# EAGLE board rgbboard (EAGLE 7.3.0)
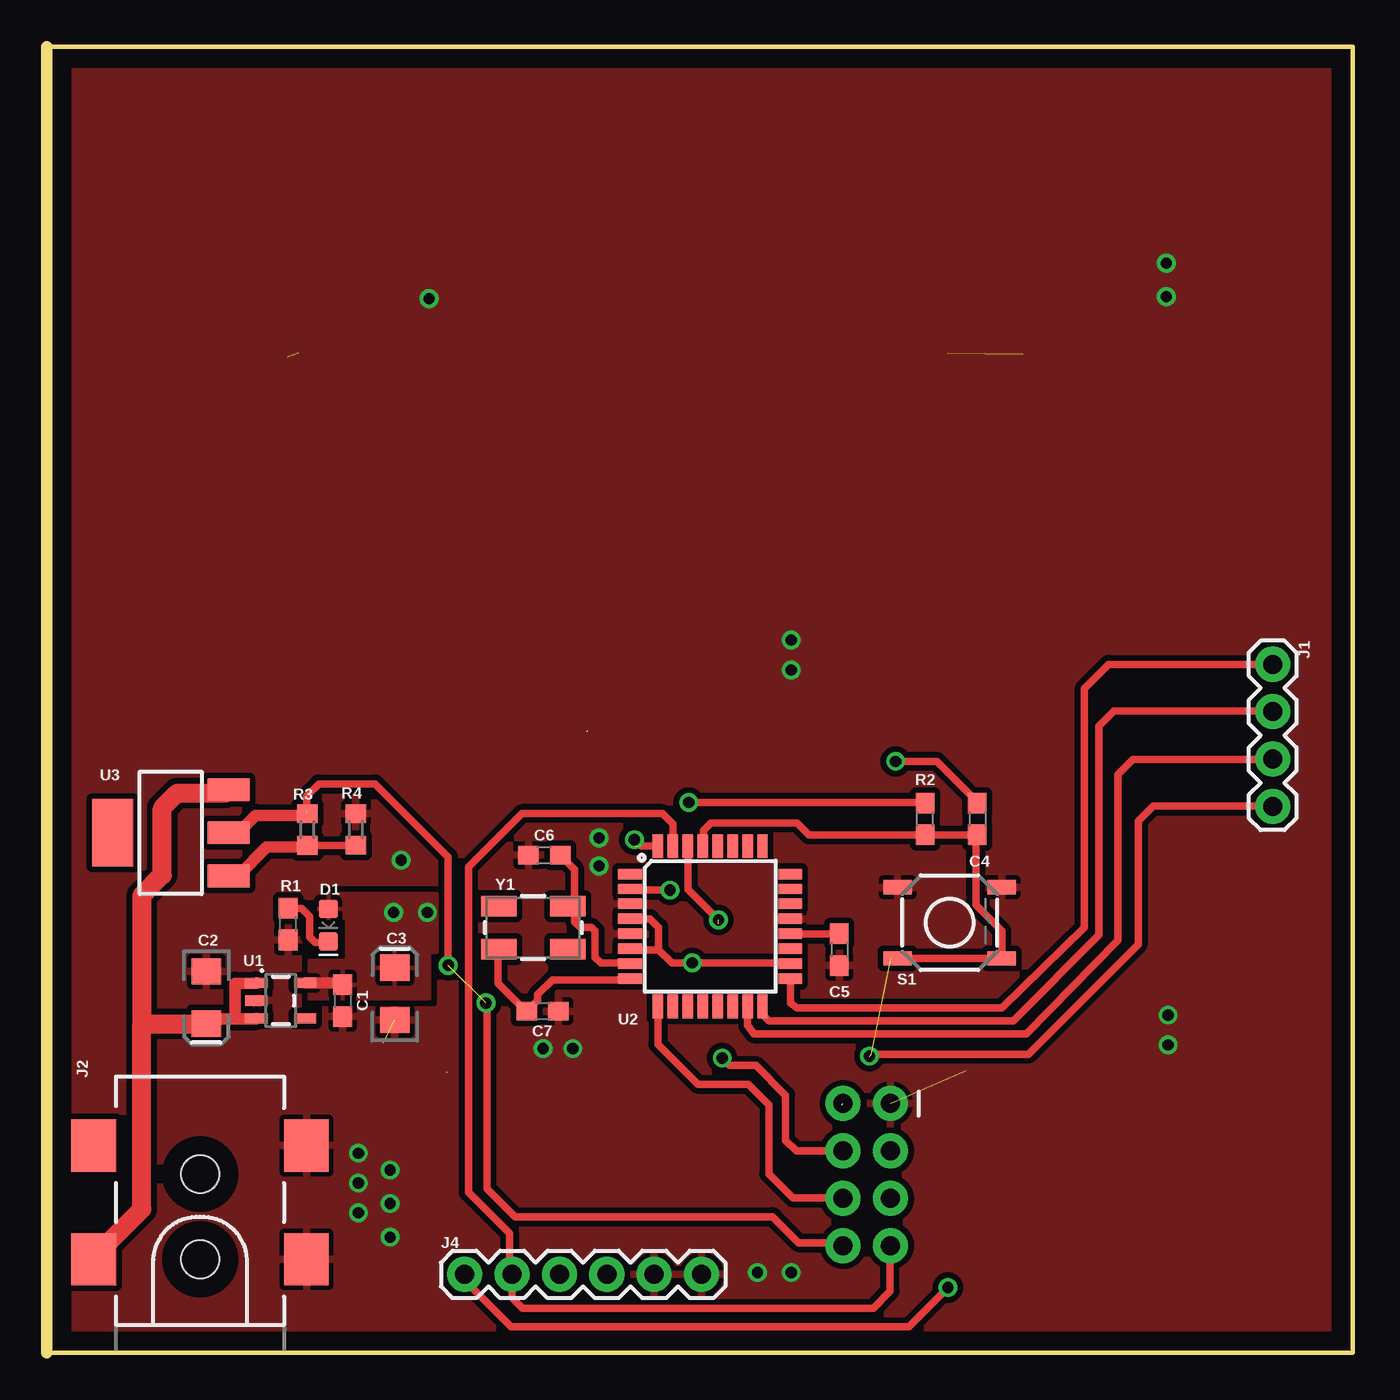
[diagram p0: board, top side]
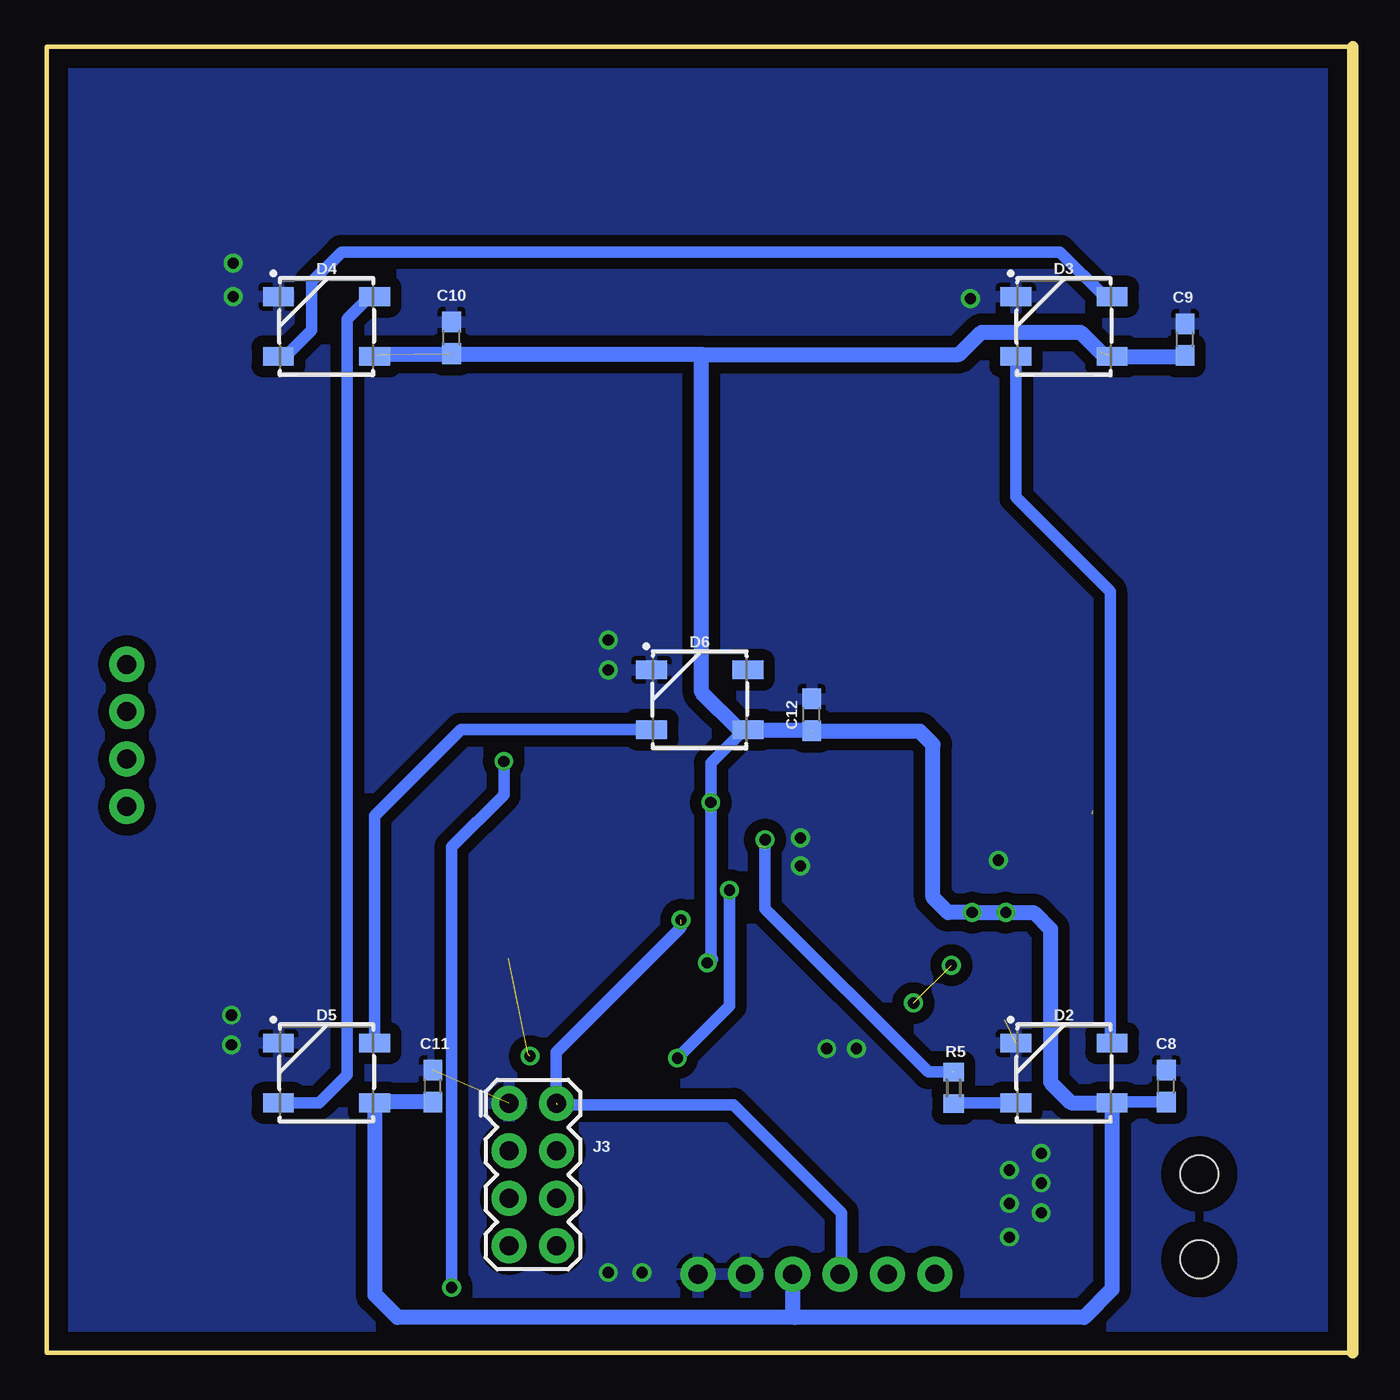
[diagram p1: board, bottom side, seen from below]

Size 70 x 70 mm. Coordinates in mm from the lower left corner, seen from the top.
Outline: 0,0 70,0 70,70 0,70 0,0
Copper layers (1*16): Top 0.035mm / dielectric 1.5mm / Bottom 0.035mm
Design rules "default *": minimum track width 6mil, minimum drill 3mil, track to track 6mil, track to pad 6mil, pad to pad 6mil, via to via 6mil, smd to smd 6mil, copper to edge 40mil, drill to drill 6mil, minimum pad ring 10mil, minimum via ring 8mil, stop-mask expansion 4mil, vias tented up to drill 0mil, thermal gap 10mil
Net classes: 0 5V: width 0.508 mm

## Footprints (pad centres in the part's own frame; a part is rotated, then mirrored left to right if it is on the bottom)
0603 = smd 1.1 x 1: 1 -0.85,0; 2 0.85,0
EIA3216 = smd 1.4 x 1.6: + 1.4,0; - -1.4,0
LED-0603 = smd 1 x 1: A -0.877,0; C 0.877,0
WS2812B = smd 1.651 x 1: 1 2.577,-1.6; 2 2.577,1.6; 3 -2.577,1.6; 4 -2.577,-1.6
1X04 = drill 1.016 pad 1.88: 1 0,0; 2 2.54,0; 3 5.08,0; 4 7.62,0
POWER_JACK_SMD = smd 2.8 x 2.4: GND 0,-5.7; P$4 6.1,-5.7; VIN0 0,5.7; VIN1 6.1,5.7 | hole 2.032: 0,0; 4.572,0
2X4 = drill 1.016 pad 1.88: 1 -3.81,-1.27; 2 -3.81,1.27; 3 -1.27,-1.27; 4 -1.27,1.27; 5 1.27,-1.27; 6 1.27,1.27; 7 3.81,-1.27; 8 3.81,1.27
1X06 = drill 1.016 pad 1.88: 1 0,0; 2 2.54,0; 3 5.08,0; 4 7.62,0; 5 10.16,0; 6 12.7,0
R0603 = smd 1 x 1.1: 1 -0.85,0; 2 0.85,0
TACTILE_SWITCH_SMD_5.2MM = smd 1.524 x 0.762: 1 -2.794,1.905; 2 2.794,1.905; 3 -2.794,-1.905; 4 2.794,-1.905
SOT23-5 = smd 0.55 x 1.2: 1 -0.95,-1.3; 2 0,-1.3; 3 0.95,-1.3; 4 0.95,1.3; 5 -0.95,1.3
TQFP32-08 = smd 1.27 x 0.559: 1 -4.293,2.8; 2 -4.293,2; 3 -4.293,1.2; 4 -4.293,0.4; 5 -4.293,-0.4; 6 -4.293,-1.2; 7 -4.293,-2; 8 -4.293,-2.8; 17 4.293,-2.8; 18 4.293,-2; 19 4.293,-1.2; 20 4.293,-0.4; 21 4.293,0.4; 22 4.293,1.2; 23 4.293,2; 24 4.293,2.8 | smd 0.559 x 1.27: 9 -2.8,-4.293; 10 -2,-4.293; 11 -1.2,-4.293; 12 -0.4,-4.293; 13 0.4,-4.293; 14 1.2,-4.293; 15 2,-4.293; 16 2.8,-4.293; 25 2.8,4.293; 26 2,4.293; 27 1.2,4.293; 28 0.4,4.293; 29 -0.4,4.293; 30 -1.2,4.293; 31 -2,4.293; 32 -2.8,4.293
SOT223 = smd 1.219 x 2.235: 1 -2.311,-3.099; 2 0,-3.099; 3 2.311,-3.099 | smd 3.6 x 2.2: 4 0,3.099
CRYSTAL-SMD-5X3.2-4PAD = smd 1.9 x 1.1: 1 -1.85,-1.15; 2 1.85,-1.15; 3 1.85,1.15; 4 -1.85,1.15

## Placement (x,y rotation side)
C1  0.1uF  [0603]  15.86,18.88 270 top
C2  10uF  [EIA3216]  8.56,19.04 270 top
C3  10uF  [EIA3216]  18.66,19.24 90 top
C4  0.1uF  [0603]  49.87,28.61 270 top
C5  0.1uF  [0603]  42.48,21.61 270 top
C6  22pF  [0603]  26.67,26.67 0 top
C7  22pF  [0603]  26.57,18.31 180 top
C8  0.1uF  [0603]  10,14.3 90 bottom
C9  0.1uF  [0603]  9,54.3 90 bottom
C10  0.1uF  [0603]  48.3,54.4 90 bottom
C11  0.1uF  [0603]  49.3,14.3 90 bottom
C12  0.1uF  [0603]  29,34.2 90 bottom
D1  RED  [LED-0603]  15.1,22.92 270 top
D2  WS2812B  [WS2812B]  15.48,15 0 bottom
D3  WS2812B  [WS2812B]  15.48,55 0 bottom
D4  WS2812B  [WS2812B]  55,55 0 bottom
D5  WS2812B  [WS2812B]  55,15 0 bottom
D6  WS2812B  [WS2812B]  35,35 0 bottom
FRAME1  FRAME-LETTER  [CREATIVE_COMMONS]  -101.6,25.4 0 top  (outside the outline)
J1  BOOT  [1X04]  65.7,36.9 270 top
J2  5.5x2.1mm Barrel  [POWER_JACK_SMD]  8.22,5.01 90 top
J3  ESP  [2X4]  43.95,9.55 270 bottom
J4  PROG  [1X06]  22.4,4.2 0 top
R1  10k  [0603]  12.94,22.98 90 top
R2  10k  [0603]  47.08,28.61 90 top
R3  240  [R0603]  13.97,28.04 90 top
R4  390  [R0603]  16.57,28.05 270 top
R5  240  [R0603]  21.4,14.2 90 bottom
S1  Reset  [TACTILE_SWITCH_SMD_5.2MM]  48.39,23.05 0 top
U1  MIC5219 5V  [SOT23-5]  12.55,18.88 270 top
U2  ATMEGA328P_TQFP  [TQFP32-08]  35.56,22.86 0 top
U3  V_REG_317SMD  [SOT223]  6.65,27.87 90 top
Y1  16MHz  [CRYSTAL-SMD-5X3.2-4PAD]  26.07,22.79 0 top

## Library data of the parts
C1 C4 C5 C8-C12 = SparkFun-Capacitors; PROD_ID: CAP-08604
C2 C3 = SparkFun-Capacitors; PROD_ID: CAP-00811
C6 C7 = SparkFun-Capacitors; PROD_ID: CAP-07876
D1 = SparkFun-LED; PROD_ID: DIO-00819
D2-D6 = SparkFun-LED; PROD_ID: DIO-12503
FRAME1 = SparkFun-Aesthetics
J1 = SparkFun-Connectors; PROD_ID: CONN-09696
J2 = SparkFun-Connectors; PROD_ID: CONN-08106; SF_ID: PRT-12748
J3 J4 = SparkFun-Connectors
R1 R2 = SparkFun-Resistors; PROD_ID: RES-00824
R3-R5 = resistor
S1 = SparkFun-Switches; PROD_ID: SWCH-08247; SF_SKU: COM-08720
U1 = SparkFun-IC-Power; PROD_ID: VREG-10107
U2 = SparkFun-IC-Microcontroller; PROD_ID: IC-09069
U3 = SparkFun-IC-Power
Y1 = SparkFun-Clocks; PROD_ID: XTAL-08218; SF_ID: COM-00094

## Nets
3.3V: J3.8 R3.2 U3.2
5V: C1.1 C3.+ C8.1 C9.1 C10.1 C11.1 C12.1 D1.A D2.1 D3.1 D4.1 D5.1 D6.1 J4.4 R2.2 U1.5 U2.4 U2.6 U2.18
DIN: R5.2 U2.32
DTR: C4.1 J4.1
ESP_EN: J3.4 U2.2
ESP_RST: J3.6 U2.9
GND: C1.2 C2.- C3.- C5.2 C6.1 C7.1 C8.2 C9.2 C10.2 C11.2 C12.2 D2.3 D3.3 D4.3 D5.3 D6.3 J2.GND J2.P$4 J3.1 J4.5 J4.6 R1.1 R4.1 S1.1 S1.2 U1.2 U2.3 U2.5 U2.21
MISO: J1.2 U2.16
MOSI: J1.3 U2.15
N$1: D2.2 D3.4
N$2: D1.C R1.2
N$3: D3.2 D4.4
N$4: D4.2 D5.4
N$5: D5.2 D6.4
N$7: C5.1 U2.20
N$8: C6.2 U2.7 Y1.3
N$9: C7.2 U2.8 Y1.1
N$10: R3.1 R4.2 U3.1
N$11: D2.4 R5.1
RESET: C4.2 J1.4 R2.1 S1.3 S1.4 U2.29
RX: J3.2 J4.3 U2.30
SCK: J1.1 U2.17
TX: J3.7 J4.2 U2.31
VIN: C2.+ J2.VIN0 U1.1 U1.3 U3.3

## Tracks (layer width: path | path; a pad name or v marks a point on that pad's centre or on a via)
3.3V  (via drill 0.61)  (2 unrouted)
  Top 0.406: 13.78,28.7 R3.2 | v23.55,18.75 23.6,18.69 23.6,8.8 25.1,7.3 38.9,7.3 40.3,5.9 42.52,5.9 J3.8 | 13.95,29.03 13.95,29.84 14.6,30.5 17.6,30.5 21.52,26.58 v21.52,20.77
  Top 0.61: U3.2 10.27,27.87 11.2,28.8 13.88,28.8 R3.2
5V  (via drill 0.6)  (3 unrouted)
  Top 0.254: 31.32,21.49 U2.6 | 46.86,29.49 R2.2
  Top 0.406: 46.86,29.49 v34.41,29.49 | U2.18 39.81,20.9 v34.6,20.9 33.5,20.9 32.8,21.6 | 32.8,21.6 31.33,21.6 U2.6 | 32.8,21.6 32.8,22.8 32.34,23.26 U2.4 | 15.76,19.83 C1.1
  Top 0.61: U1.5 15.76,19.83
  Bottom 0.61: C8.1 12.4,13.45 12.85,13.45 D2.1 | 34.41,21.09 v34.41,29.49 v34.4,29.5 34.4,31.6 32.9,33.1 32.9,33.4
  Bottom 0.813: 28.95,33.3 23.2,33.3 22.5,32.6 22.5,24.4 21.7,23.6 v20.4,23.6 17.1,23.6 16.2,22.7 16.2,14.5 15.1,13.4 D2.1 | 34.41,21.09 v34.6,20.9 | D2.1 12.45,13.4 12.4,13.45 | C12.1 32.42,33.35 D6.1 32.9,33.4 34.9,35.4 34.9,53.4 | 34.9,53.4 35,53.5 52.32,53.5 D4.1 | 13.5,53.6 14.6,54.7 19.9,54.7 21.1,53.5 34.9,53.5 34.9,53.4 | D3.1 9.05,53.4 C9.1 | D2.1 12.9,3.4 14.4,1.9 29.9,1.9 | 29.9,1.9 51.2,1.9 52.4,3.1 52.4,13.38 D5.1 52.37,13.45 C11.1 | J4.4 30.02,2.02 29.9,1.9
  other vias: 18.6,23.6
  pour Top (isolate 0.254): 14.1,19 14.1,21 16.1,21 16.1,22.9 16.1,23.3 14.6,23.3 14.6,24.6 20.9,24.6 20.9,21.5 20.5,21.5 20.5,19
DIN  (via drill 0.61)  (2 unrouted)
  Top 0.406: U2.32 31.85,27.15 v31.5,27.5
  Bottom 0.406: 31.5,27 31.5,27.1
  Bottom 0.61: 21.45,15.05 22.75,15.05 31.5,23.8 v31.5,27.5
DTR  (via drill 0.6)
  Top 0.254: 50.06,29.49 C4.1
  Top 0.406: C4.1 49.87,29.53 47.7,31.7 v45.5,31.7 | J4.1 22.4,3.9 24.9,1.4 46.2,1.4 v48.3,3.5
  Bottom 0.61: v48.3,3.5 48.3,27.1 45.5,29.9 v45.5,31.7
ESP_EN  (via drill 0.6)
  Top 0.406: J3.4 40.18,10.82 39.6,11.4 39.6,13.8 38,15.4 36.6,15.4 v36.2,15.8 | U2.2 31.2,24.8 v33.4,24.8
  Bottom 0.61: v33.4,24.8 33.4,18.6 v36.2,15.8
ESP_RST
  Top 0.406: U2.9 32.76,16.54 34.9,14.4 37.6,14.4 38.7,13.3 38.7,9.6 40,8.3 42.66,8.3 J3.6
GND  (via drill 0.6, 0.6 pad 0.61)  (2 unrouted)
  other vias: 16.7,10.7 16.7,9.1 16.7,7.5 20.5,56.5 60,58.4 60,56.6 60.1,18.1 60.1,16.5 39.9,36.6 39.9,38.2 29.6,27.6 29.6,26.1 38.1,4.3 39.9,4.3 18.4,9.8 18.4,8 18.4,6.2 26.6,16.3 28.2,16.3 19,26.4
  pour Top (isolate 0.305, rank 2): 0,0 0,70 70,70 70,0
  pour Bottom (isolate 0.61): 0,0 0,70 70,70 70,0
MISO
  Top 0.406: U2.16 38.36,18.14 38.7,17.8 51.8,17.8 56.4,22.4 56.4,33.6 57.2,34.4 65.66,34.4 J1.2
MOSI
  Top 0.406: U2.15 37.56,17.54 37.9,17.1 52.5,17.1 57.4,22.1 57.4,31 58.2,31.8 65.68,31.8 J1.3
N$1
  Bottom 0.61: D3.4 18.06,45.86 13,40.8 13,16.7 D2.2
N$2
  Top 0.406: R1.2 13.67,23.83 14.1,23.4 14.1,22.3 14.4,22 15.06,22 D1.C
N$3
  Bottom 0.61: D3.2 13.3,56.6 15.7,59 54.2,59 55.8,57.4 55.8,54.8 57,53.6 57.38,53.6 D4.4
N$4
  Bottom 0.61: D4.2 52.7,56.6 53.9,55.4 53.9,14.9 55.4,13.4 D5.4
N$5
  Bottom 0.61: D5.2 52.42,28.78 47.8,33.4 D6.4
N$7
  Top 0.406: U2.20 C5.1
N$8
  Top 0.406: C6.2 28.3,25.9 28.3,24.06 | 28.3,24.06 Y1.3 | 31.21,20.8 U2.7 31.23,20.9 29.7,20.9 29.4,21.2 29.4,22.6 29.2,22.8 28.6,22.8 28.3,23.1 28.3,24.06
N$9
  Top 0.406: U2.8 31.21,20 27.1,20 26.3,19.2 26.3,18.9 C7.2 25.69,18.31 24.2,19.8 24.2,21.62 Y1.1
N$10
  Top 0.406: R3.1 R4.2
  Top 0.61: U3.1 10.26,25.56 11.8,27.1 13.88,27.1 R3.1
N$11
  Bottom 0.61: D2.4 21.35,13.4 R5.1
RESET  (via drill 0.6)  (2 unrouted)
  Top 0.406: U2.29 35.2,27.19 35.2,28 35.6,28.4 40.2,28.4 40.84,27.76 R2.1 C4.2 49.8,27.69 49.8,24 51.18,22.62 S1.4 | S1.3 S1.4 | 44.2,16 52.6,16 58.5,21.9 58.5,28.5 59.3,29.3 65.68,29.3 J1.4 | S1.4 45.26,21.14
  other vias: 44.1,15.9
RX  (via drill 0.6)  (2 unrouted)
  Top 0.406: U2.30 34.36,24.84 v36,23.2
  Bottom 0.61: 42.62,13.3 33.2,13.3 27.4,7.5 27.4,4.28 J4.3 | 36,23 36,22.8 42.7,16.1 42.7,13.38 J3.2
SCK
  Top 0.406: U2.17 39.85,18.75 40.2,18.5 51.2,18.5 55.6,22.8 55.6,35.6 56.9,36.9 J1.1
TX
  Top 0.406: U2.31 33.56,28.34 33,28.9 25.47,28.9 22.6,26.03 22.6,8.6 24.8,6.4 24.8,4.34 J4.2 24.94,2.96 25.5,2.4 44.3,2.4 45.2,3.3 45.2,5.72 J3.7
VIN
  Top 0.508: 9.1,17.9 9,18 C2.+
  Top 0.61: 9.1,17.9 10.1,17.9 | 10.1,17.9 10.1,19.8 11.22,19.8 U1.1 | 10.1,17.9 11.22,17.9 U1.3
  Top 1.016: J2.VIN0 2.52,5.12 5.1,7.7 5.1,17.64 | U3.3 9.57,30 7,30 6.2,29.2 6.2,25.6 5.1,24.5 5.1,17.64 | 5.1,17.64 C2.+
  Top 1.27: C2.+ 8.52,17.6